# Altium PCB Solenoid Control Board.PcbDoc
Units mil, origin at the board's own origin, x right, y up, seen from the top; angles counter-clockwise.
Board outline 5265 x 2215 mil, 2 copper layers (Top Layer, Bottom Layer); 24 components, 8 nets, 81 pads, 11 vias.
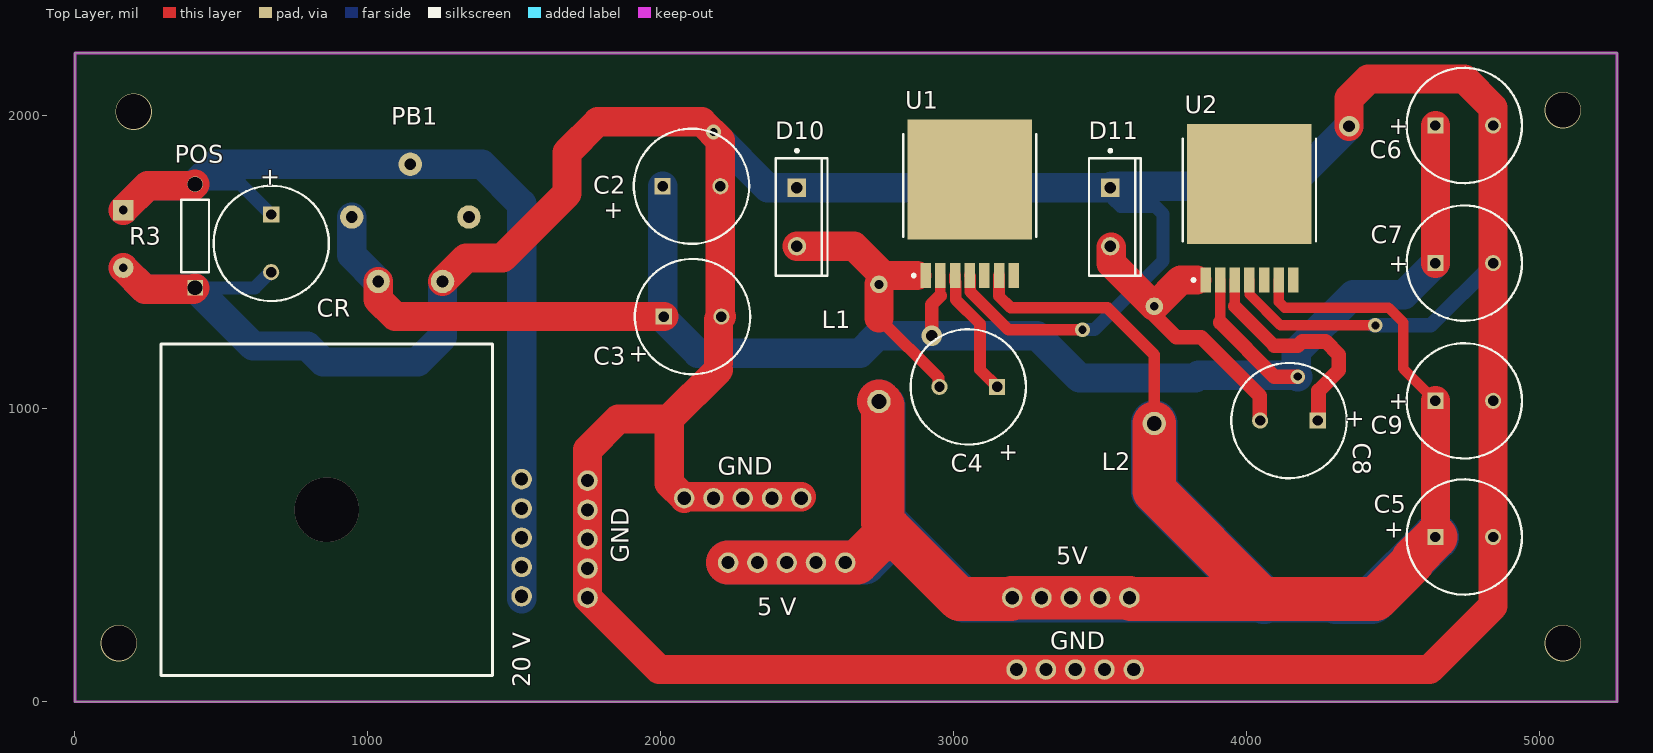
[diagram p0: Top Layer view]
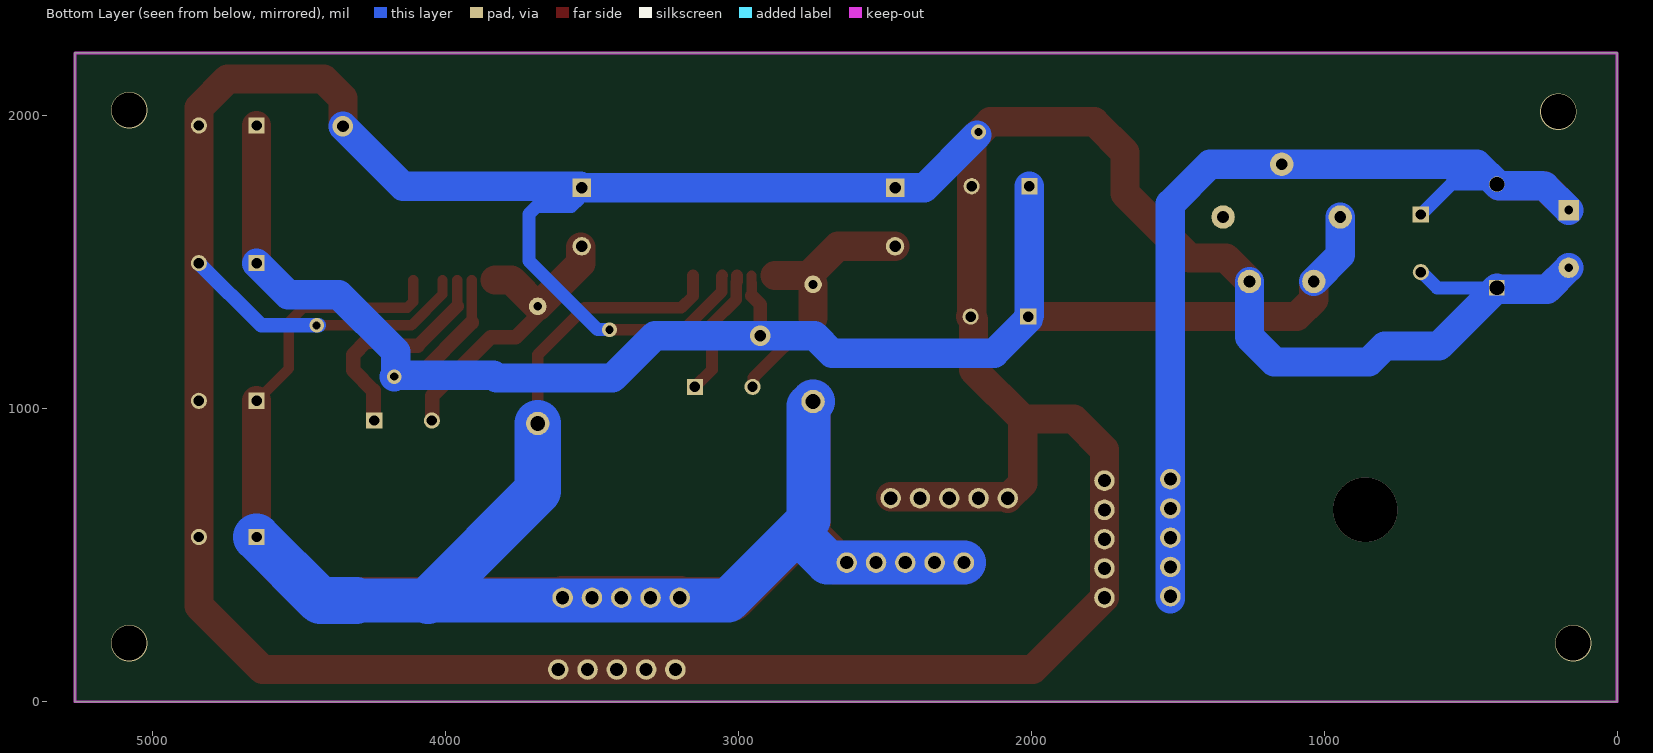
[diagram p1: Bottom Layer view, seen from below]

## Layer stack, top to bottom
Top Solder: solder mask 0.4, Solder Resist, Dk 3.5
Top Layer: signal copper 1.4
Dielectric 1: dielectric 12.6, FR-4, Dk 4.8
Bottom Layer: signal copper 1.4
Bottom Solder: solder mask 0.4, Solder Resist, Dk 3.5

## Board outline
0,0 5265,0 5265,2215 0,2215

## Design rules (kind name [scope] priority, off if disabled: settings)
Clearance [All] p1: gap=10 ignorepadtopadclearanceinfootprint=FALSE except(0: Arc-Hole Track-Hole SMDPad-Hole THPad-Hole Via-Hole Fill-Hole Poly-Hole Region-Hole Text-Hole)
PolygonConnect [All] p1: connectstyle=Relief reliefconductorwidth=10 reliefentries=4 polygonreliefangle="90 Angle" airgapwidth=10
RoutingVias [All] p1: holewidth=28 width=50 viastyle="Through Hole" minholewidth=28 minwidth=50 maxholewidth=28 maxwidth=50
SolderMaskExpansion [All] p1: expansion=4 istentingtop=FALSE
Width [All] p1: maxlimit=500 minlimit=35 preferedwidth=45 minimp=50.000000 maximp=50.000000 favimp=50.000000
30 further rules are at their usual default settings.

## Classes and differential pairs
component class "Power Board": "5 V" 5V "20 V" C2 C3 C4 C5 C6 C7 C8 C9 CR D10 D11 GND L1 L2 PB1 POS R3 U1 U2

## Components (designator, comment, footprint, x,y, rotation, side; value= is the part's Value field where it differs from the comment)
"5 V" "PPTC051LFBN-RC" PPTC051LFBN-RC-Footprint-1 2430,475 r0 top
5V "PPTC051LFBN-RC" PPTC051LFBN-RC-Footprint-1 3400,355 r0 top
"20 V" "PPTC051LFBN-RC" PPTC051LFBN-RC-Footprint-1 1525,560 r90 top
C2 "ECA-2AM101" CAPPR65-500-1600X1000X1700 2105,1760 r0 top value=82µF
C3 "ECA-2AM101" CAPPR65-500-1600X1000X1700 2108.43,1315 r0 top value=82pF
C4 "ECA-2AM101" CAPPR65-500-1600X1000X1700 3050,1075 r180 top value=10nF
C5 "ECA-2AM101" CAPPR65-500-1600X1000X1700 4743.43,562.44 r0 top value=330µF
C6 "ECA-2AM101" CAPPR65-500-1600X1000X1700 4743.43,1967.44 r0 top value=82µF
C7 "ECA-2AM101" CAPPR65-500-1600X1000X1700 4743.43,1497.44 r0 top value=82pF
C8 "ECA-2AM101" CAPPR65-500-1600X1000X1700 4145,960 r180 top value=10nF
C9 "ECA-2AM101" CAPPR65-500-1600X1000X1700 4743.43,1027.44 r0 top value=330µF
CR "ECA-2AM101" CAPPR65-500-1600X1000X1700 670,1565 r270 top value=500µF
D10 "MBR1635-E3/45" INF-PG-TO220-2-1 2465,1655 r0 top
D11 "MBR1635-E3/45" INF-PG-TO220-2-1 3535,1655 r0 top
GND "PPTC051LFBN-RC" PPTC051LFBN-RC-Footprint-1 3415,110 r0 top (schematic designator GND?)
GND "PPTC051LFBN-RC" PPTC051LFBN-RC-Footprint-1 1750,555 r90 top
GND "PPTC051LFBN-RC" PPTC051LFBN-RC-Footprint-1 2280,695 r0 top
L1 "15uH" "Through Hole Inductor-Footprint-1" 2745,1225 r270 top
L2 "15uH" "Through Hole Inductor-Footprint-1" 3685,1150 r270 top
PB1 "Push Button" "Push Button-Footprint-1" 1145,1635 r0 top
POS "TB003-500-P02BE" "Rectifier Input-Footprint-1" 165,1580 r270 top
R3 "1k Through-Hole 1/4W" RESA60-630X240 410,1590 r90 top
U1 "LM2678SX-5.0/NOPB" FP-KTW0007B-MFG 3055,1700 r0 top
U2 "LM2678SX-5.0/NOPB" FP-KTW0007B-MFG 4010,1684.98 r0 top

## Footprints (in the part's own frame and the unit in brackets; to place one, negate y for a bottom-side part, rotate by r counter-clockwise, add the part's x,y. Pads: shape width x height; smd on the part's side, far side on the other; paste and mask are expansions set on the pad)
CAPPR65-500-1600X1000X1700 [mm] "THD, 2-Leads, Dia 10mm, Body Length 16mm"
  rect 1.4x1.4 hole 0.9: 1(-2.5,0)
  round 1.4 hole 0.9: 2(2.5,0)
  silkscreen extent -5,-5 5,5, body extent -5,-5 4.95,5, height 17
FP-KTW0007B-MFG [mm]
  rect 0.91x2.16 smd paste+0 mask+0: 1(-3.81,-6.222) 2(-2.54,-6.222) 3(-1.27,-6.222) 4(0,-6.222) 5(1.27,-6.222) 6(2.54,-6.222) 7(3.81,-6.222)
  rect 10.8x10.41 smd paste+0 mask+0: ""(0,2.097)
  silkscreen extent -5.77,-6.35 5.77,6.03, body extent -5.5,-7.4 5.5,7.4, height 0.25
INF-PG-TO220-2-1 [mm] "FM, 2-Leads, Body 10x4.4mm, Pitch 5.08mm"
  rect 1.6x1.6 hole 1: 1(0,2.54)
  round 1.6 hole 1: 2(0,-2.54)
  silkscreen extent -1.85,-5.1 2.65,5.87, body extent -1.85,-5.1 2.65,5.1, height 19.65
PPTC051LFBN-RC-Footprint-1 [mil]
  round 70 hole 45: 1(-200,0) 2(-100,0) 3(0,0) 4(100,0) 5(200,0)
"Push Button-Footprint-1" [mil]
  round 80 hole 40: 1(-110,-200) 2(0,200) 3(-200,20) 4(200,20) 5(110,-200)
"Rectifier Input-Footprint-1" [mil]
  rect 70x70 hole 30: 1(-98.43,0)
  round 70 hole 30: 2(98.43,0)
RESA60-630X240 [mm] "Axial Resistor, 2-Leads, Dia 2.4mm, Body Length 6.3mm"
  rect 1.35x1.35 hole 1.27: 1(-4.5,0)
  round 1.35 hole 1.27: 2(4.5,0)
  silkscreen extent -3.15,-1.2 3.15,1.2, body extent -3.15,-1.2 3.15,1.2, height 2.4
"Through Hole Inductor-Footprint-1" [mil]
  round 60 hole 30: 1(-200,0)
  round 80 hole 50: 2(200,0)

## Part data
"5 V" 5V "20 V" GND GND GND: library part CMP-002-00096-1, "5 Position Header Connector 0.100\" (2.54mm) Through Hole Tin"
C2 C3 C4 C5 C6 C7 C8 C9 CR: library part CMP-001-00034-5, "Aluminum Electrolytic Capacitor, 100 uF, +/- 20%, 100 V, -40 to 85 degC, 2-Pin THD, RoHS, Bulk", Capacitor Type=Electrolytic, Case/Package=Radial, Manufacturer=Panasonic, Max Operating Temperature=85°C, Min Operating Temperature=-40°C, Package Description="2-Pin Through Hole Device, Dia 10 mm, Body Length 16 mm", Package Quantity=200, Package Reference=CAPPR65-500-1600X1000X1700, Ripple Current=350mA, Tolerance=20%, Voltage Rating=100V, Datasheet URL=https://industrial.panasonic.com/cdbs/www-data/pdf/RDF0000/ABA0000C1047.pdf, Datasheet Version=Mar-16, Diameter=10mm, Lead Pitch=5mm, Manufacturer URL=http://www.panasonic.com/, Mounting Technology=TH, Packaging=Bulk, Pins=2, Ripple Current (AC)=350mA, RoHS Compliant=True
D10 D11: library part CMP-004-00031-1, "MBR1635 Series 35 V 16 A Through Hole Schottky Rectifier - TO-220AC"
L1 L2: library part CMP-006-00021-1, "Ferrite Core Magnetic Wire Through Hole"
PB1: library part CMP-011-00018-2, "12V-24V/ 5A Power LED: 1NO 1NC ON OFF Toggle Switch with Indicating LED"
POS: library part CMP-002-00094-2
R3: library part CMP-009-00195-1, "RES 1K OHM 1/4W 1% AXIAL", Case/Package=Axial, Max Operating Temperature=155°C, Max Power Dissipation=250mW, Min Operating Temperature=-55°C, Package Quantity=200, Resistance=1kR, Resistor Type="Metal Film", Temperature Coefficient=100ppm/°C, Tolerance=1%, Voltage Rating=250V, Voltage Rating (DC)=200V, Lead Diameter=0.6mm, Lead Free="Lead Free", Length=0.248inch, Mount="Through Hole", Number of Terminations=2, Packaging=Bulk, Power Rating=250mW, RoHS Compliant=Yes, Series=MFR, Termination=Axial, Width=6.3mm
U1 U2: library part CMP-019-00050-1, "IC REG BUCK 5V 5A TO263-7"

## Via types
v1: diameter 50, hole 28, Top Layer to Bottom Layer, 4 vias
v2: diameter 125, hole 120, Top Layer to Bottom Layer, 4 vias
v3: diameter 70, hole 40, Top Layer to Bottom Layer, 2 vias
v4: diameter 220, hole 220, Top Layer to Bottom Layer, 1 vias

## Nets (pads, with @x,y where several pads share a name; then routed paths per layer and width w, separated by ;. In a path a pad name is that pad's centre, name@x,y a point inside that pad or via, vN(x,y) a via of type N, cw(c..) or ccw(c..) an arc to the next point about the centre after c; other vN are vias at no path point)
GND: C2.2 C3.2 C5.2 C6.2 C7.2 C9.2 CR.2 D10.1 D11.1 GND.1 GND.2 GND.3 GND.4 GND.5 PB1.5 POS.2 R3.1 U1.4 U2.4 | length 16070.2
  Top Layer w20: C2.2@2203.43,1756.57 C2.2 ; D10.1@2460,1750 D10.1
  Top Layer w35: U2.4 4010.41,1439.59 4010.41,1390.26 4115.68,1285 v1(4440,1285)
  Top Layer w40: U1.4 3057.09,1452.93 3057.09,1400.07 3187.16,1270 v1(3440,1270)
  Top Layer w45: 2196.85,1133.15 2196.85,1156.85
  Top Layer w100: POS.2 238.74,1407.83 405,1407.83 R3.1 ; PB1.5 1335,1515 1460,1515 1680,1735 1680,1875 1785,1980 2140,1980 2203.43,1916.57 C2.2 ; GND.1@2080,695 2028.7,746.3 2028.7,965 ; GND.1@2080,700 2180,700 GND.5@2480,700 ; 2196.85,1133.15 2028.7,965 ; 2196.85,1156.85 2196.85,1305 C3.2 ; C3.2@2203.43,1334.55 C2.2@2203.43,1756.57 ; v3(4350,1965) 4350,2060 4416.08,2126.08 4743.92,2126.08 4841.85,2028.15 C6.2 C7.2 C9.2 C5.2 4841.85,326.85 4625,110 3615,110 3515,110 3415,110 3315,110 3215,110 1995,110 1750,355 1750,455 1750,555 1750,655 1750,755 1750,860 1855,965 2028.7,965
  Bottom Layer w45: R3.1 613.52,1412.83 667.26,1466.57 CR.2 ; v1(3440,1270) 3440.41,1270.41 3480.41,1270.41 3715,1505 3715,1665.05 3688.64,1691.41 3570.36,1691.41 3544,1717.77 3544,1746 D11.1
  Bottom Layer w50: v1@4433.51,1285 v1(4440,1285) 4629.41,1285 C7.2
  Bottom Layer w100: POS.2 238.74,1407.83 405,1407.83 R3.1 608.15,1214.68 793.15,1214.68 847.83,1160 1170,1160 1255,1245 PB1.5 ; v1@2185,1935 2365,1755 D10.1 D11.1 3540,1760 4145,1760 v3(4350,1965)
  other v1: 2180,1945
"Net5 V_1": 5V.1 5V.2 5V.3 5V.4 5V.5 "5 V.1" "5 V.2" "5 V.3" "5 V.4" "5 V.5" C5.1 C9.1 L1.2 L2.2 U1.6 U2.6 | length 10046.1
  Top Layer w35: U2.6 4110.41,1439.59 4110.41,1365.5 4130.92,1345 4485,1345 4535,1295 4535,1137.44 C9.1
  Top Layer w40: U1.6 3155,1385 3195,1345 3525,1345 3685,1185 L2.2
  Top Layer w45: 2800,570 2830,600 ; 4567.47,477.47 4567.47,484.91
  Top Layer w100: C5.1 C9.1
  Top Layer w150: 2230,475 2330,475 2430,475 2530,475 2630,475 2670,475 2782.5,587.5 ; L1.2 2757.9,1012.11 2757.9,612.11 2800,570 3020,350 3195,350 5V.1 5V.2 5V.3 5V.4 5V.5 3605,350 4055,350 ; L2.2 3685,720 4055,350 ; 4567.47,477.47 4440,350 4055,350 ; 4567.47,484.91 C5.1
  Bottom Layer w45: 2800,580 2830,610
  Bottom Layer w150: 2230,475 2330,475 2430,475 2530,475 2630,475 2695,475 2800,580 ; L1.2 2760.29,1009.71 2760.29,619.71 2800,580 ; 4305,345 4060,345 3610,345 3035,345 2800,580
  Bottom Layer w160: L2.2 3685,720 4060,345 ; 4305,345 4427.56,345 C5.1
"Net20 V_1": "20 V.1" "20 V.2" "20 V.3" "20 V.4" "20 V.5" CR.1 PB1.2 POS.1 R3.2 | length 3413.7
  Top Layer w100: POS.1 248.74,1762.17 405,1762.17 R3.2
  Bottom Layer w45: 246.58,1760 255,1760 257.17,1762.17 ; R3.2 566.26,1767.17 CR.1
  Bottom Layer w100: POS.1 246.58,1760 ; 257.17,1762.17 402.58,1762.17 407.58,1767.17 R3.2 477.83,1835 PB1.2 1390,1835 1525,1700 1525,351.78
NetC2_1: C2.1 C3.1 C6.1 C7.1 PB1.1 PB1.3 U1.2 U2.2 | length 5938.8
  Top Layer w35: 2954.59,1385.9 2954.59,1430 2955,1430.41 U1.2 ; 3910,1295 U2.2
  Top Layer w45: v3(2925,1250) 2925,1356.32 2954.59,1385.9
  Top Layer w50: 3910,1295 4095,1110 v1(4175,1110)
  Top Layer w100: PB1.1 1035,1373.58 1093.58,1315 C3.1 ; C7.1 C6.1
  Bottom Layer w35: 3825.94,1105 3835.94,1115
  Bottom Layer w60: v1@4170,1115 v1(4175,1110)
  Bottom Layer w100: PB1.3 945,1525 PB1.1 ; C2.1 2006.58,1318.43 C3.1 2010,1306.57 2126.58,1190 2680,1190 2740,1250 v3(2925,1250) 3285,1250 3430,1105 3825.94,1105 ; 3835.94,1115 v1@4170,1115 ; v1(4175,1110) v1@4170,1115 ; C7.1 4537.56,1390 4364.79,1390 4170,1195.21 v1@4170,1115
NetC4_1: C4.1 U1.3 | length 439.4
  Top Layer w40: U1.3 3005,1434.59 3007.09,1432.5 3007.09,1372.91 3090,1290 3090,1133.43 C4.1
NetC4_2: C4.2 D10.2 L1.1 U1.1 | length 893.2
  Top Layer w40: 2745,1310 2948.68,1106.32 2948.68,1077.89 C4.2
  Top Layer w45: L1.1 2749.06,1425 2779.08,1455.02
  Top Layer w100: D10.2 2660,1555 2745,1470 ; 2745,1310 L1.1 ; 2779.08,1455.02 2875,1455.02
NetC8_1: C8.1 U2.3 | length 780.3
  Top Layer w35: 3960,1350 U2.3
  Top Layer w45: 3960,1350 4095,1215
  Top Layer w50: 4095,1215 4174.93,1215 4189.93,1230 4269.85,1230 4315,1184.85 4315,1131.57 4245.98,1062.56 4245.98,962.56 C8.1
NetC8_2: C8.2 D11.2 L2.1 U2.1 | length 1006.3
  Top Layer w45: D11.2 D11.2@3538.44,1551.56
  Top Layer w50: 3686.91,1318.09 3760,1245 3845,1245 4045.6,1044.4 4045.6,960.98 C8.2
  Top Layer w100: D11.2@3538.44,1551.56 3538.44,1496.56 L2.1 3775,1440 3830,1440
pads on no net: PB1.4 U1. U1.5 U1.7 U2. U2.5 U2.7
copper on no net:
  other v2: 150,200 5080,200 200,2015 5080,2020
  other v4: 860,655

## Keep-outs
Keep-Out Layer:
  the board outline again, w10

## Silkscreen, mask and mechanical layers (free items; w line width, h text height)
Top Overlay:
  lines w10: 294.06,89.06 1425.94,89.06 1425.94,1220.94 294.06,1220.94 294.06,89.06

## Text inside footprints (layer, text, board x,y; h text height)
C2: Top Overlay "+" at 1805,1650 h59.06
C3: Top Overlay "+" at 1890,1160 h59.06
C4: Top Overlay "+" at 3220,875 h59.06 r180
C5: Top Overlay "+" at 4470,560 h59.06
C6: Top Overlay "+" at 4485.56,1937.91 h59.06
C7: Top Overlay "+" at 4485.56,1467.91 h59.06
C8: Top Overlay "+" at 4402.86,989.53 h59.06 r180
C9: Top Overlay "+" at 4485.56,997.91 h59.06
CR: Top Overlay "+" at 640.47,1822.86 h59.06 r270